# Altium PCB rf_main.PcbDoc (part 2 of 3)
Units mil, origin at the board's own origin, x right, y up, seen from the top; angles counter-clockwise.
Board outline 7331.84 x 2609.86 mil, 2 copper layers (Top Layer, Bottom Layer); 310 components, 184 nets, 868 pads, 739 vias.
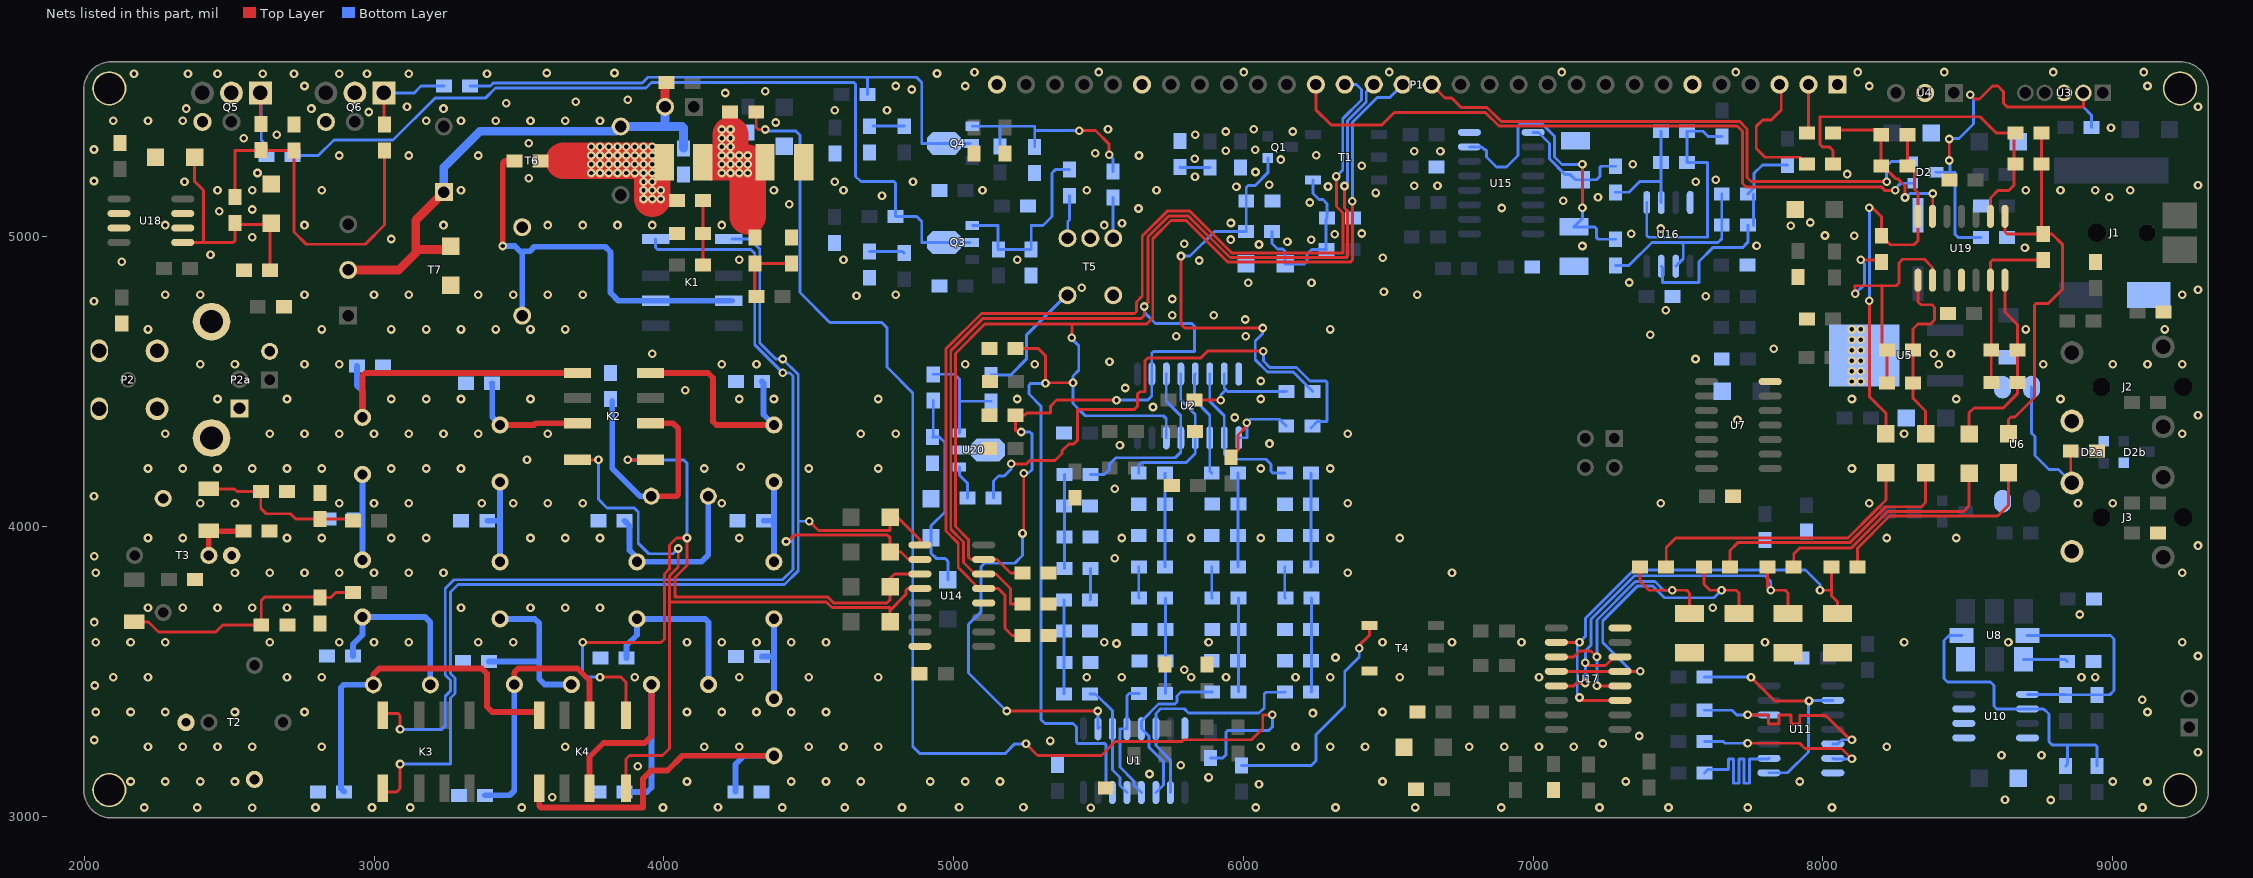
[diagram p2: the nets of this part, all layers, seen from the top]

## Via types
v1: diameter 30, hole 15, Top Layer to Bottom Layer, 739 vias

## Nets (pads, with @x,y where several pads share a name; then routed paths per layer and width w, separated by ;. In a path a pad name is that pad's centre, name@x,y a point inside that pad or via, vN(x,y) a via of type N, cw(c..) or ccw(c..) an arc to the next point about the centre after c; other vN are vias at no path point) (continued)
B3: C23.2 R3c.1 U2.7 | length 402.6
  Top Layer w10: R3c.1@5831.14,4435.78 5921.78,4435.78 v1(5922,4436)
  Bottom Layer w10: v1(5922,4436) 5922,4454 5940,4472 ; U2.7@5934,4526 5934,4478 5940,4472 ; C23.2@6149.14,4466.22 6054.22,4466.22 6054,4466 5946,4466 5940,4472
B4: C24.2 R3d.2 U2.9 | length 372.5
  Top Layer w10: R3d.2@5957.78,4238.86 5982,4263.08 5982,4316 6012,4346 v1(6012,4358)
  Bottom Layer w10: U2.9@5984,4306 6012,4306 v1(6012,4358) 6024,4370 6124.29,4370 C24.2@6148.07,4346.22
BAND0: C2a.1 C63.2 P1.16 U1.14 U2.14 U14.15 | length 6117.9
  Top Layer w10: C2a.1@5215.14,4613.78 5292.22,4613.78 5317,4589 v1(5317,4494) 5319,4496 v1(5412,4496) ; C63.2@5237.14,3839.78 5196.22,3839.78 5150,3886 U14.15@5104,3886 5060,3886 5052,3894 5052,3954 5006.22,3999.78 5006.22,4597.22 5107,4698 5408,4698 ; v1(5408,4651) 5408,4698 ; v1(6376,5122) 6376,4919 6369,4912 5946.75,4912 5802.75,5056 5750.37,5056 5687.27,4992.9 5687.27,4719.27 5666,4698 5408,4698
  Bottom Layer w10: v1(5317,4494) 5266,4494 5260,4488 5260,4457 5302,4415 5302,3333 5315,3320 5412,3320 5424,3308 5424,3254 5427,3251 5523,3251 5526,3248 5526,3104 U1.14@5548,3082 ; v1(5408,4651) 5408,4647.77 5432,4623.77 5432,4539 5412,4519 v1(5412,4496) 5412,4424.53 5454.31,4382.22 5723.78,4382.22 5734,4372 U2.14@5734,4306 ; v1(6376,5122) 6377,5123 6377,5395 6462,5480 6505,5480 P1.16@6550,5525
BAND1: C2b.1 C62.2 P1.17 U1.2 U2.2 U14.14 | length 6250.5
  Top Layer w10: v1(5183,3363) v1(5498,3363) ; v1(5234,4326) 5220,4326 5214.14,4331.86 C2b.1@5214.14,4383.78 5243.78,4383.78 5251.5,4391.5 5335,4391.5 5335,4416 5355,4436 v1(5562,4436) ; v1(5238,3976) 5242,3980 v1(5242,4184) ; C62.2@5249.14,3732 5196,3732 5196,3786 5146,3836 U14.14@5104,3836 5102,3834 5076,3834 5034,3876 5034,3946.63 4990.22,3990.41 4990.22,4606.59 5100.63,4717 5647,4717 5658,4728 v1(5658,4759) 5671.27,4772.27 5671.27,4999.53 5743.75,5072 5809.37,5072 5953.37,4928 6357,4928 6360,4931 6360,5088 6349,5099 v1(6349,5175)
  Bottom Layer w10: v1(5183,3363) 5052,3494 5052,3662.3 5094,3704.3 5094,3860 5107,3873 5211,3873 5238,3900 v1(5238,3976) ; v1(5234,4326) 5264,4326 5270,4320 5270,4195 5259,4184 v1(5242,4184) ; v1(5498,3363) U1.2@5498,3302 U1.2@5503,3307 ; v1(5562,4436) 5670,4436 5684,4450 U2.2@5684,4526 5684,4598 5690,4604 5832,4604 5832,4690 5822,4700 5697,4700 5658,4739 v1(5658,4759) ; v1(6349,5175) 6359,5185 6359,5400 6424,5465 6424,5499 P1.17@6450,5525
BAND2: C61.2 P1.18 U14.13 | length 3617.8
  Top Layer w10: C61.2@5249.14,3641.78 5231.37,3624 5202,3624 5178,3648 5178,3762 5154,3786 U14.13@5104,3786 5088,3786 5016,3858 5016,3942 4974,3984 4974,4014 4974.22,4014.22 4974.22,4613.22 5096,4735 5624,4735 5631,4742 5631,4775 5651,4795 5651,5001.88 5737.12,5088 5816,5088 5960,4944 6344,4944 6344,5081.37 6321,5104.37 v1(6321,5208)
  Bottom Layer w10: v1(6321,5208) 6343,5230 6343,5407 6408,5472 6408,5506.41 6407.5,5506.9 6407.5,5508 6390.5,5525 P1.18@6350,5525
EXT_M: K1.8 K3.8 R32.1 U14.2 | length 4093
  Top Layer w10: K3.8@3030.39,3359.8 3036.19,3354 3084,3354 3090,3348 v1(3090,3300) ; v1(4410,4530) v1@4414,4526 ; v1(4422,3948) 4428,3948 4450,3970 4772,3970 4781.14,3960.86 R32.1@4781.14,3911.78 4818.22,3911.78 4844,3886 U14.2@4884,3886
  Bottom Layer w10: v1(3090,3300) 3234,3300 3246,3312 3246,3414 3263.29,3431.29 3263.29,3470.08 3246,3487.37 3246,3786 3276,3816 4410,3816 4446,3852 4446,3950 ; K1.8@3972.02,4991.61 3972.02,4962.4 3978.42,4956 4300,4956 4314,4942 4314,4627.37 v1@4410.69,4530.69 ; v1(4410,4530) 4435.37,4530 4446,4519.37 4446,3950 ; v1(4422,3948) 4444,3948 4446,3950
EXT_P: K1.1 K3.1 R31.1 U14.1 | length 3981.4
  Top Layer w10: K3.1@3030.39,3084.2 3078.2,3084.2 3090,3096 v1(3090,3180) ; v1@4500,4020 v1(4502,4018) 4534,3986 4781.14,3986 R31.1@4781.14,4031.78 4806.22,4031.78 4884,3954 U14.1@4884,3936
  Bottom Layer w10: v1(3090,3180) 3264,3180 3264,3408 3279.29,3423.29 3279.29,3476.71 3264,3492 3264,3774 3290,3800 4416.63,3800 4464,3847.37 4464,4020 ; K1.1@4235.8,4991.61 4297.39,4991.61 4331,4958 4331,4633 4386,4578 v1(4410,4578) 4464,4524 4464,4020 ; v1(4502,4018) 4466,4018 4464,4020
GND: C1a.2 C1b.2 C2a.2 C2b.2 C2c.2 C2d.2 C7.2 C8.2 C9.1 C10.1 C15.2 C16.2 C17.1 C18.1 C25.2 C26.2 C27.2 C28.2 C28a.1 C29.2 C29a.1 C30.2 C31.2 C32.1 C33.2 C33a.1 C33b.2 C34.2 C35.1 C36.2 C40.2 C42.1 C45.2 C46.2 C47.1 C48.1 C49.2 C50.1 C51.1 C52.1 C53.2 C54.1 C55.1 C56.1 C57.2 C58.2 C59.1 C60.1 C61.1 C62.1 C63.1 C63a.2 C65.2 C66.1 C67.2 C68.2 C69.2 C72.1 C75.1 C76.2 C76a.2 C77.1 C79.1 C80.1 C82.1 C83.2 C84.2 C85.2 C86.2 C87.2 C88.1 C89.1 C90.2 C93.2 C94.2 C94a.2 C95.2 C96.2 C96a.2 C97.2 C98.1 C101.1 C102.1 C103.2 C104.1 C105.2 C106.1 C106a.2 C114.2 C115.2 C126.1 C127.1 C128.2 C129.1 D1.1 D2a.1 D2b.1 D4.1 DS1.1 J1.2 J2.S J3.S L1.1 L2.1 L3.1 L4.1 L9.1 L10.1 L11.1 L12.1 P1.1 P1.6 P1.25 P1.30 P2.2 P2a.2 pad.h1 pad.h2 pad.h3 pad.h4 Q5.2 Q6.2 R1a.1 R1c.1 R2b.2 R2d.2 R10.2 R11.1 R14.2 R37.2 R38.1 R50.1 R57.1 R58.1 R61.2 R62.2 R69.1 R74.2 R76.2 R77.1 R79.1 R83b.1 R101.1 T2.1 T2.5 T3.1 T3.5 T4.6 T5.2 T5.4 T7.5 U1.8 U2.8 U3.3 U4.2 U5.2 U6.2 U6.3 U7.7 U8.3 U10.4 U10.5 U10.6 U10.7 U11.7 U14.8 U14.12 U15.8 U16.4 U17.8 U18.2 U18.3 U18.6 U18.7 U19.11 U20.2
  other v1: 2580,3029 5473,3029 2207,3030 2390,3030 2798,3030 2993,3030 3125,3030 3510,3030 3997,3030 4409,3030 4624,3030 4822,3030 6043,3030 6318,3030 6593,3030 6890,3030 7229,3030 7467,3030 7741,3030 8031,3030 9103,3030 4187,3031 5019,3031 5241,3031 8786,3056 8628,3057 3615,3066 6054,3110 2160,3120 2280,3120 2400,3120 2520,3120 4080,3120 4440,3120 4560,3120 4680,3120 4920,3120 5040,3120 5160,3120 6480,3120 7320,3120 7920,3120 9000,3120 9120,3120 5880,3134 5676,3146 3910,3173 5784,3176 8616,3210 8754,3210 9294,3221 2220,3240 2340,3240 2460,3240 2580,3240 2820,3240 3660,3240 4140,3240 4260,3240 4500,3240 4620,3240 4740,3240 6060,3240 6180,3240 6300,3240 6420,3240 6780,3240 6900,3240 7020,3240 7140,3240 8220,3240 7240,3251 5334,3260 2035,3263 7366,3277 6240,3356 2040,3360 2160,3360 2280,3360 2520,3360 2760,3360 4080,3360 4200,3360 4320,3360 4440,3360 4560,3360 6480,3360 9120,3360 9102,3402 2036,3451 2100,3480 2220,3480 2700,3480 2820,3480 3900,3480 4260,3480 4500,3480 4740,3480 5460,3480 5580,3480 5820,3480 5940,3480 6180,3480 6300,3480 6540,3480 7020,3480 8892,3480 8940,3480 5796,3506 6318,3548 9294,3553 5562,3596 2040,3600 2160,3600 2280,3600 2640,3600 2880,3600 3000,3600 3120,3600 3360,3600 3480,3600 4080,3600 4200,3600 4320,3600 4440,3600 4560,3600 5520,3600 5880,3600 6480,3600 6720,3600 6960,3600 7800,3600 8280,3600 8640,3600 9240,3600 2035,3670 8886,3696 2220,3720 2340,3720 2460,3720 2580,3720 2700,3720 3300,3720 3540,3720 3660,3720 3780,3720 7620,3720 2040,3840 2520,3840 2640,3840 2760,3840 2880,3840 3000,3840 3120,3840 3240,3840 6360,3840 6720,3840 9240,3840 5556,3890 2035,3897 9294,3934 2220,3960 2340,3960 2700,3960 2820,3960 3060,3960 3180,3960 3540,3960 3660,3960 3780,3960 4260,3960 5580,3960 5820,3960 6060,3960 6300,3960 6540,3960 8220,3960 8460,3960 2400,4080 2520,4080 2880,4080 3000,4080 3120,4080 3372,4080 3480,4080 3600,4080 3720,4080 4200,4080 6360,4080 7440,4080 8160,4080 8880,4080 9000,4080 2034,4104 5556,4130 2220,4200 2340,4200 2460,4200 2580,4200 2700,4200 2820,4200 3060,4200 3180,4200 3300,4200 4140,4200 4500,4200 4740,4200 6060,4200 6300,4200 8100,4200 4266,4206 3528,4230 5574,4280 6090,4286 2280,4320 2640,4320 2760,4320 2880,4320 3000,4320 3120,4320 3240,4320 3360,4320 3600,4320 4680,4320 4800,4320 6360,4320 8280,4320 9240,4320 7705,4368 5970,4376 9294,4384 5688,4412 2460,4440 2700,4440 3060,4440 3180,4440 3300,4440 3540,4440 4260,4440 4380,4440 4740,4440 5220,4440 6060,4440 8100,4440 8460,4440 8820,4440 4074,4470 5592,4478 8100,4500 8130,4500 6060,4502 8100,4536 8130,4536 2400,4560 2520,4560 2760,4560 2880,4560 4200,4560 4320,4560 5040,4560 5280,4560 8400,4560 8760,4560 9000,4560 9120,4560 9240,4560 5538,4568 8100,4572 8130,4572 7560,4578 3960,4596 8382,4596 8442,4596 8100,4608 8130,4608 7830,4613 8100,4644 8130,4644 5768,4656 6008,4656 7404,4662 2220,4680 2820,4680 3060,4680 3180,4680 3300,4680 3420,4680 3540,4680 3660,4680 6300,4680 8100,4680 8130,4680 8700,4680 9180,4680 6007,4714 5755,4729 5898,4729 7458,4746 2034,4777 5755,4785 7596,4794 4665,4796 2280,4800 2400,4800 2760,4800 3000,4800 3120,4800 3360,4800 3480,4800 3600,4800 3720,4800 4800,4800 6600,4800 9240,4800 6485,4810 9294,4817 5442,4824 6017,4841 6235,4841 7332,4842 2130,4914 5848,4918 4260,4920 4620,4920 5220,4920 6481,4927 2436,4938 8697,4962 7170,4968 7771,4969 6054,4973 5796,4976 6152,4983 6234,4989 5956,4990 3060,4992 2580,4998 8108,5003 8007,5004 6315,5008 7338,5010 6409,5011 7440,5028 7889,5038 2280,5040 2760,5040 3240,5040 3600,5040 3720,5040 3840,5040 3960,5040 4200,5040 5520,5040 5581,5046 5957,5047 7956,5049 2466,5088 2580,5094 5638,5097 6892,5099 4433,5112 6229,5118 7104,5124 7224,5136 8988,5136 4753,5141 6457,5151 2460,5160 2580,5160 2820,5160 3300,5160 4380,5160 4620,5160 5100,5160 5460,5160 5700,5160 8700,5160 8820,5160 8940,5160 9060,5160 5976,5172 6292,5173 6590,5176 6670,5176 9294,5178 6089,5179 2346,5190 4590,5190 4860,5190 7561,5190 2034,5192 7630,5196 3534,5202 5833,5207 8084,5216 2598,5220 6042,5223 6408,5245 7344,5250 6129,5266 5832,5269 2880,5280 3120,5280 3360,5280 5640,5280 6252,5281 5489,5288 6590,5295 6680,5295 5939,5296 6041,5300 2034,5301 3534,5322 2550,5340 2664,5352 5834,5352 5939,5363 6170,5363 5533,5371 6036,5371 8994,5376 4386,5394 2100,5400 2220,5400 2340,5400 3180,5400 3300,5400 3420,5400 3540,5400 3660,5400 3780,5400 2982,5430 4590,5436 4770,5436 2352,5442 2784,5442 3240,5442 3114,5448 9294,5448 3456,5460 3696,5466 3876,5472 4212,5496 4350,5502 4856,5508 2760,5520 4800,5520 5040,5520 8160,5520 9120,5520 2172,5562 2358,5562 2460,5562 2616,5562 2724,5562 2880,5562 2976,5562 3120,5562 3390,5562 4943,5563 3596,5565 3830,5565 5072,5567 5501,5568 6001,5568 6503,5568 7099,5568 7699,5568 8120,5568 8419,5568 8795,5568 9107,5568
IN_I: P1.3 R84.1 | length 473.7
  Top Layer w10: P1.3@7850,5525 7856,5519 7856,5437.23 7820.77,5402 7791,5402 7770,5381 7770,5304 7800,5274 7921.08,5274 R84.1@7944.86,5250.22
IN_Q: P1.2 R85.1 | length 168.9
  Top Layer w10: R85.1@7944.86,5358.22 7950,5363.37 P1.2@7950,5525
INT_M: K2.8 K4.8 R34.1 U14.4 | length 2612.6
  Top Layer w10: K2.8@3702.02,4230.39 3702.41,4230 v1(3774.47,4230) ; K4.8@3869.61,3084.2 3869.61,3197.61 3882,3210 3996,3210 4020,3234 4020,3740 ; v1(4050,3924) 4050,3860 4020,3830 4020,3740 ; U14.4@4884,3786 4842,3786 4836,3780 4836,3766 4781.14,3711.14 R34.1@4781.14,3671.78 4781.14,3718.86 4780,3720 4580,3720 4560,3740 4020,3740
  Bottom Layer w10: v1(3774.47,4230) 3774.47,4093.8 3804.47,4063.8 3898.2,4063.8 3912,4050 3912,3942 3948,3906 4032,3906 v1(4050,3924)
INT_P: K2.1 K4.1 R33.1 U14.3 | length 2766.5
  Top Layer w10: v1(3720,3600) 3990,3600 4002,3612 4002,3836 4020,3854 4020,3936 4044,3960 v1(4080,3960) 4080,3865 4039,3824 4039,3756 4566.63,3756 4586.63,3736 4770,3736 4781.14,3747.14 R33.1@4781.14,3791.78 4781.14,3821.14 4796,3836 U14.3@4884,3836 ; v1(3780,3480) 3852,3480 3869.61,3462.39 K4.1@3869.61,3359.8 ; v1(3875.53,4230) 3953.59,4230 K2.1@3953.98,4230.39 ; K2.1@3965.4,4230 K2.1@3965.8,4230.39
  Bottom Layer w10: v1(3720,3600) 3720,3492 3732,3480 v1(3780,3480) ; v1(3875.53,4230) 4068,4230 4080,4218 v1(4080,3960)
JC_CLK1: R23.2 U11.5 U11.12 | length 822.3
  Top Layer w10: v1(7740,3350) 7812,3350 7812,3318 7848,3318 7848,3350 7890,3350 7890,3318 7920,3318 7920,3348 8010,3348 8094,3264 v1(8100,3264)
  Bottom Layer w10: R23.2@7590.86,3365.78 7686.22,3365.78 7702,3350 v1(7740,3350) U11.12@7814,3350 ; U11.5@8034,3250 8051.43,3250 8065.43,3264 v1(8100,3264)
JC_CLK2: R25.2 U11.6 | length 600.9
  Top Layer w10: v1(7740,3252) 7920,3252 7938,3234 8064,3234 v1(8100,3198)
  Bottom Layer w10: R25.2@7590.86,3257.78 7591.08,3258 7656,3258 7662,3252 v1(7740,3252) ; U11.6@8034,3200 8036,3198 v1(8100,3198)
JC_CLK3: R24.2 U11.9 | length 601
  Bottom Layer w10: R24.2@7590.86,3149.78 7603.08,3162 7674,3162 7674,3198 7692,3198 7692,3114 7710,3114 7710,3198 7728,3198 7728,3114 7746,3114 7746,3198 7812,3198 U11.9@7814,3200
JC_CLK4: R22.2 U11.2 U11.8 | length 820.7
  Top Layer w10: v1(7752,3480) 7834,3398 v1(7952,3398)
  Bottom Layer w10: R22.2@7590.86,3479.78 7591.08,3480 v1(7752,3480) ; U11.8@7814,3150 7878,3150 7950,3222 7950,3396 v1(7952,3398) 7954,3400 U11.2@8034,3400
LO_SCL: R17.1 R20.1 U8.8 U10.2 | length 1064.7
  Bottom Layer w10: U8.8@8479.8,3624 U8.8@8477.83,3624 8436,3624 8418.22,3606.22 8418.22,3475 8430.22,3463 8578,3463 8590,3451 8590,3380 8599.39,3370.61 U10.2@8706.17,3370.61 8761.76,3370.61 8780,3352.36 8780,3257.39 8791.39,3246 8844,3246 ; R20.1@8837.78,3173.14 8844,3179.37 8844,3246 ; R17.1@8945.78,3173.14 8945.78,3240.22 8940,3246 8844,3246
LO_SDA: R16.1 R21.1 U8.7 U10.1 | length 787.8
  Bottom Layer w10: U8.7@8704.2,3624 U8.7@8706.17,3624 8992,3624 9004.09,3611.91 9004.09,3433.43 8989.8,3419.14 R16.1@8945.78,3419.14 R21.1@8837.78,3419.14 8836.31,3420.61 U10.1@8706.17,3420.61
NetC1_1: C1.1 C81.1 | length 4303.3
  Top Layer w10: C81.1@4319.14,5429.78 4319.14,5376.86 4326,5370 v1(4350,5370) ; v1(5250,3250) 5290,3210 5510,3210 5558,3258 5787.23,3258 5793.23,3264 6028,3264 6067,3303 6067,3350 v1(6100,3350)
  Bottom Layer w10: v1(4350,5370) 4356,5364 4456,5364 4470,5350 4470,4807 4573,4704 4752,4704 4770,4686 4770,4550 4859,4461 4859,3241 4884,3216 5177,3216 5211,3250 v1(5250,3250) ; C1.1@5886.22,3200.86 5928.86,3200.86 5940,3212 5940,3290 5945.78,3295.78 6087.78,3295.78 6100,3308 v1(6100,3350)
NetC2_1: C2.1 T4.4 | length 807.5
  Top Layer w10: v1(6400,3580) 6400,3590 6435.83,3625.83 T4.4@6435.83,3658.74
  Bottom Layer w10: C2.1@5993.78,3175.14 6234.14,3175.14 6250,3191 6250,3280 6350,3380 6350,3500 6400,3550 v1(6400,3580)
NetC3_1: C3.1 C7.1 C11.1 L1.2 | length 324
  Bottom Layer w10: C3.1@5380.92,3422.63 C7.1@5380.92,3638.63 C11.1@5380.92,3746.63
NetC3_2: C3.2 U1.3 U1.13 | length 404.9
  Bottom Layer w10: C3.2@5470.92,3422.63 5471.56,3422 5490,3422 5549,3363 5549,3303 U1.3@5548,3302 5548,3160 5574,3134 5574,3106 U1.13@5598,3082
NetC4_1: C4.1 C8.1 C12.1 L2.2 | length 324
  Bottom Layer w10: C4.1@5982.63,3429.08 C8.1@5982.63,3645.08 C12.1@5982.63,3753.08
NetC4_2: C4.2 U1.5 U1.11 | length 587.1
  Bottom Layer w10: U1.11@5698,3082 5724,3108 5724,3188 5675,3237 5675,3275 U1.5@5648,3302 5648,3328 5707,3387 5764.03,3387 5770.78,3393.74 5770.78,3414.78 5785.08,3429.08 C4.2@5892.63,3429.08
NetC5_1: C5.1 C9.2 C13.1 L3.2 | length 325.5
  Bottom Layer w10: C5.1@6233.14,3428.22 6234.63,3429.71 C13.1@6234.63,3753.08
NetC5_2: C5.2 U1.6 U1.10 | length 809.7
  Bottom Layer w10: U1.10@5748,3082 5748,3194 5698,3244 U1.6@5698,3302 5698,3355 5714,3371 5796,3371 5811,3356 6054,3356 6072,3374 6072,3422 6078,3428 6142.92,3428 C5.2@6143.14,3428.22
NetC6_1: C6.1 C10.2 C14.1 L4.2 | length 330
  Bottom Layer w10: C6.1@5730.63,3423.08 C14.1@5730.63,3753.08
NetC6_2: C6.2 U1.4 U1.12 | length 434.2
  Bottom Layer w10: C6.2@5640.63,3423.08 5605.08,3423.08 5598,3416 U1.4@5598,3302 5574,3302 5574,3170 5622,3122 5622,3108 U1.12@5648,3082
NetC11_2: C11.2 L5.1 | length 109.2
  Bottom Layer w10: C11.2@5470.92,3746.63 5472.63,3748.35 L5.1@5472.63,3855.08
NetC12_2: C12.2 L6.1 | length 108.3
  Bottom Layer w10: L6.1@5890.92,3860.63 5890.92,3754.79 C12.2@5892.63,3753.08
NetC13_2: C13.2 L7.1 | length 108.3
  Bottom Layer w10: L7.1@6142.92,3860.63 6142.92,3754.79 C13.2@6144.63,3753.08
NetC14_2: C14.2 L8.1 | length 107.3
  Bottom Layer w10: L8.1@5639.14,3859.78 5639.14,3754.57 C14.2@5640.63,3753.08
NetC15_1: C15.1 C19.2 L5.2 L9.2 | length 324
  Bottom Layer w10: L5.2@5382.63,3855.08 L9.2@5382.63,3963.08 C19.2@5382.63,4179.08
NetC16_1: C16.1 C20.2 L6.2 L10.2 | length 324
  Bottom Layer w10: L6.2@5980.92,3860.63 L10.2@5980.92,3968.63 C20.2@5980.92,4184.63
NetC17_2: C17.2 C21.2 L7.2 L11.2 | length 324
  Bottom Layer w10: L7.2@6232.92,3860.63 L11.2@6232.92,3968.63 C17.2@6232.92,4076.63 C21.2@6232.92,4184.63
NetC18_2: C18.2 C22.2 L8.2 L12.2 | length 324.9
  Bottom Layer w10: C22.2@5728.92,4184.63 C18.2@5728.92,4076.63 L12.2@5728.92,3968.63 5728.92,3860 L8.2@5729.14,3859.78
NetC19_1: C19.1 U2.3 U2.13 | length 645.1
  Bottom Layer w10: C19.1@5472.63,4179.08 5521.08,4179.08 5538,4196 5538,4215 5560,4237 5765,4237 5784,4256 U2.13@5784,4306 5784,4382 5734,4432 U2.3@5734,4526
NetC20_1: C20.1 U2.5 U2.11 | length 366.6
  Bottom Layer w10: U2.5@5834,4526 5832,4524 5832,4436 5884,4384 U2.11@5884,4306 5884,4191.56 C20.1@5890.92,4184.63
NetC21_1: C21.1 U2.6 U2.10 | length 546.8
  Bottom Layer w10: U2.6@5884,4526 5884,4432 5934,4382 U2.10@5934,4306 5934,4250 5952,4232 6078,4232 6096,4214 6096,4190 6101.37,4184.63 C21.1@6142.92,4184.63
NetC22_1: C22.1 U2.4 U2.12 | length 533.2
  Bottom Layer w10: C22.1@5638.92,4184.63 5638.92,4211.08 5648.84,4221 5803,4221 5834,4252 U2.12@5834,4306 5834,4386 5784,4436 U2.4@5784,4526
NetC23_1: C23.1 Q1.1 R36.2 R37.1 | length 1444.8
  Top Layer w10: v1(5785,4933) 5785,4698 5798,4685 v1(6067,4685)
  Bottom Layer w10: v1(5785,4933) 5816,4933 5901,5018 6009.79,5018 6009.86,5017.93 R37.1@6009.86,5122.78 6009.86,5169.86 6016,5176 6040,5176 6084.34,5220.34 Q1.1@6084.34,5271.39 ; v1(6067,4685) 6067,4666 6041,4640 6041,4575 6083,4533 6172.37,4533 C23.1@6239.14,4466.22
NetC24_1: C24.1 C113.2 | length 1823.4
  Top Layer w10: v1(5199,4216) 5251,4216 5263,4228 5350,4228 5374,4252 5374,4261 5398,4285 5415,4285 5427,4297 5427,4401 5429,4403 5623,4403 5634,4414 5634,4456 5643,4465 5660,4465 5660,4571 5671,4582 5854,4582 5877,4605 v1(6069,4605)
  Bottom Layer w10: C113.2@5137.86,4098.78 5137.86,4156.86 5155,4174 5175,4174 5199,4198 v1(5199,4216) ; v1(6069,4605) 6069,4571 6091,4549 6183,4549 6229.78,4502.22 6284.78,4502.22 6289,4498 6289,4362 6254.92,4362 C24.1@6233.14,4340.22
NetC33a_2: C33a.2 J3.R U6.4 | length 516.3
  Top Layer w10: J3.R@8855.14,4154.21 C33a.2@8855.14,4259.78 ; C33a.2@8856.86,4260.22 C33a.2@8859.24,4257.83
  Bottom Layer w10: U6.4@8720,4480.85 8720,4322 8732,4310 8732,4245 8780,4197 8812.35,4197 J3.R@8859.24,4150.11
NetC35_2: C35.2 U8.1 | length 154.1
  Bottom Layer w10: U8.1@8692,3541.32 8836.04,3541.32 C35.2@8843.14,3534.22
NetC45_1: C45.1 K2.5 L13.1 | length 1063.4
  Top Layer w20: L13.1@2960.36,4376.43 2960.36,4520.36 2970,4530 3689.81,4530 K2.5@3690.2,4529.61
  Bottom Layer w20: C45.1@2940.86,4553.78 2940.86,4487.14 2960.36,4467.64 L13.1@2960.36,4376.43
NetC46_1: C46.1 K2.7 L14.1 | length 412.5
  Top Layer w20: L14.1@3435.04,4350.39 3552.39,4350.39 3558,4356 K2.7@3689.83,4356
  Bottom Layer w20: C46.1@3407.14,4494.22 3408,4493.37 3408,4377.43 L14.1@3435.04,4350.39
NetC47_2: C47.2 K2.2 L15.1 | length 822.7
  Top Layer w20: L15.1@3956.69,4104.33 4044.33,4104.33 4050,4110 4050,4338 4031.62,4356.38 K2.2@3965.8,4356.38
  Bottom Layer w20: C47.2@3822,4432.92 3822,4200 3917.67,4104.33 L15.1@3956.69,4104.33
NetC48_2: C48.2 K2.4 L16.1 | length 742.6
  Top Layer w20: K2.4@3965.8,4529.61 4152.39,4529.61 4170,4512 4170,4362 4181.61,4350.39 L16.1@4379.92,4350.39
  Bottom Layer w20: C48.2@4338.86,4499.78 4344,4494.63 4344,4386.31 L16.1@4379.92,4350.39
NetC49_1: C49.1 L13.2 L17.1 | length 322.5
  Bottom Layer w20: C49.1@2933.14,4026.22 2960.14,4026.22 C49.1@2960.36,4026 ; L17.1@2960.36,3884.43 C49.1@2960.36,4026 ; L13.2@2960.36,4179.57 C49.1@2960.36,4026
NetC50_2: C50.2 L14.2 L18.1 | length 319.9
  Bottom Layer w20: C50.2@3390.86,4019.78 3434.82,4019.78 3435.04,4020 ; L18.1@3435.04,3877.95 3435.04,4020 ; L14.2@3435.04,4153.54 3435.04,4020
NetC51_2: C51.2 L15.2 L19.1 | length 618.1
  Bottom Layer w20: C51.2@3864.86,4019.78 3882,4002.63 3882,3918 3907.48,3892.52 L19.1@3907.48,3877.95 4129.95,3877.95 4153.54,3901.54 L15.2@4153.54,4104.33
NetC52_2: C52.2 L16.2 L20.1 | length 310.7
  Bottom Layer w20: C52.2@4344.86,4019.78 4379.7,4019.78 4379.92,4020 ; L20.1@4379.92,3877.95 4379.92,4020 ; L16.2@4379.92,4153.54 4379.92,4020
NetC53_1: C53.1 L17.2 L21.1 | length 606.6
  Bottom Layer w20: C53.1@2927.14,3552.22 2927.14,3593.14 2960.36,3626.36 L17.2@2960.36,3687.57 3176.43,3687.57 3194.43,3669.57 L21.1@3194.43,3453.64
NetC54_2: C54.2 L18.2 L22.1 | length 625.5
  Bottom Layer w20: C54.2@3396.86,3533.78 3569.78,3533.78 3570,3534 ; L18.2@3435.04,3681.1 3554.9,3681.1 3570,3666 3570,3534 ; L22.1@3681.1,3454.72 3589.28,3454.72 3570,3474 3570,3534
NetC55_2: C55.2 L19.2 L23.1 | length 617.1
  Bottom Layer w20: C55.2@3870.86,3545.78 3870.86,3588.86 3907.48,3625.48 L19.2@3907.48,3681.1 4142.9,3681.1 4154.43,3669.57 L23.1@4154.43,3454.72
NetC56_2: C56.2 L20.2 L24.1 | length 316.7
  Bottom Layer w20: C56.2@4338.86,3551.78 4379.7,3551.78 4379.92,3552 ; L24.1@4379.92,3405.51 4379.92,3552 ; L20.2@4379.92,3681.1 4379.92,3552
NetC57_1: C57.1 K4.4 L21.2 | length 1226.2
  Top Layer w20: L21.2@2997.57,3453.64 2997.57,3489.57 3018,3510 3372,3510 3390,3492 3390,3378 3408.2,3359.8 K4.4@3570.39,3359.8
  Bottom Layer w20: C57.1@2897.14,3084.22 2886,3095.37 2886,3444 2895.64,3453.64 L21.2@2997.57,3453.64
NetC58_1: C58.1 K4.2 L22.2 | length 906.6
  Top Layer w20: L22.2@3484.25,3454.72 3484.25,3496.25 3498,3510 3702,3510 3743.62,3468.38 K4.2@3743.62,3359.8
  Bottom Layer w20: C58.1@3383.14,3072.22 3468.22,3072.22 3484.25,3088.25 L22.2@3484.25,3454.72
NetC59_2: C59.2 K4.7 L23.2 | length 996.7
  Top Layer w20: K4.7@3743.62,3084.2 K4.7@3743.62,3096.02 3743.62,3204.62 3792,3253 3934,3253 3957.57,3276.57 L23.2@3957.57,3454.72
  Bottom Layer w20: C59.2@3864.86,3083.78 3941.78,3083.78 3957.57,3099.57 L23.2@3957.57,3454.72
NetC60_2: C60.2 K4.5 L24.2 | length 1232.4
  Top Layer w20: K4.5@3570.39,3084.2 3570.39,3035.61 3576,3030 3928,3030 3928,3129 3957,3158 4013,3158 4063.66,3208.66 L24.2@4379.92,3208.66
  Bottom Layer w20: C60.2@4247.14,3084.22 4247.14,3179.14 4276.66,3208.66 L24.2@4379.92,3208.66
NetC65_1: C65.1 C76a.1 R35.2 R36.1 T1.4 | length 588.6
  Bottom Layer w10: R36.1@6099.14,5017.22 6099.14,4976.86 6118,4958 6136,4958 6144.14,4949.86 C76a.1@6144.14,4906.22 6211.22,4906.22 6220,4915 6220,4940 6236.22,4956.22 R35.2@6287.14,4956.22 6285,4958.37 6285,5059.92 C65.1@6288.86,5063.78 6288,5064.63 6288,5115 6275,5128 6261,5128 6239.83,5149.17 T1.4@6239.83,5195.26
NetC66_2: C66.2 R39.1 | length 105
  Bottom Layer w10: C66.2@5780.78,5240.14 5782.07,5238.86 R39.1@5885.22,5238.86
NetC68_1: C68.1 R43.1 U15.9 | length 419.5
  Bottom Layer w10: U15.9@7000,5360 7018,5360 7056,5322 7056,5269 7111,5214 7128.27,5214 C68.1@7145.88,5196.39 7218.39,5196.39 7230,5208 7230,5238 7235.14,5243.14 R43.1@7283.78,5243.14
NetC69_1: C69.1 R44.1 U15.7 | length 1060.4
  Top Layer w10: v1(7170,5100) v1(7170,5250)
  Bottom Layer w10: U15.7@6780,5310 6822.23,5310 6831.23,5301 6835,5301 6839,5297 6839,5275 6874,5240 6908,5240 6948,5280 6948,5382 6954,5388 7032.53,5388 7074,5346.53 7074,5275 7100,5249 7169,5249 v1(7170,5250) ; v1(7170,5100) 7170,5063.48 C69.1@7140.12,5033.61 7212.39,5033.61 7218,5028 7218,4998 7224.86,4991.14 R44.1@7283.78,4991.14
NetC70_1: C70.1 R43.2 R45.1 U16.2 | length 418.6
  Bottom Layer w10: R43.2@7283.78,5153.14 7331.14,5153.14 7368,5190 7440.86,5190 ; C70.1@7440.86,5363.78 R45.1@7440.86,5255.78 7440.86,5190 ; U16.2@7442,5118 7440.86,5119.14 7440.86,5190
NetC70_2: C70.2 R45.2 R46.1 U16.1 | length 892.2
  Bottom Layer w10: U16.1@7392,5118 7392,5004 7398,4998 7602,4998 7602,5256 ; 7601.78,5255.78 R45.2@7530.86,5255.78 C70.2@7530.86,5363.78 7586.22,5363.78 7604.14,5345.86 R46.1@7652.22,5345.86
NetC74_1: C74.1 R44.2 R48.1 U16.6 | length 655.2
  Bottom Layer w10: R44.2@7283.78,4901.14 7331.14,4901.14 7410,4980 7512,4980 ; U16.6@7492,4898 7518,4924 7518,4974 7512,4980 ; R48.1@7650.86,5147.78 C74.1@7650.86,5039.78 7650.86,4992.86 7638,4980 7512,4980
NetC74_2: C74.2 R47.1 R48.2 U16.7 | length 826.1
  Bottom Layer w10: U16.7@7442,4898 7446,4894 7446,4842 7572,4842 7572,4914 7620,4962 7722,4962 7740.86,4980.86 C74.2@7740.86,5039.78 ; R48.2@7740.86,5147.78 7762,5168.92 7762,5218.77 7791.09,5247.86 R47.1@7877.22,5247.86 ; C74.2@7760.86,5038.78 R48.2@7760.86,5146.78
NetC78_1: C78.1 D3.2 RFC2.1 | length 430.9
  Top Layer w125: 3654,5261.78 3948.22,5261.78 v1(3960,5250) v1(3960,5220) v1(3960,5190) v1(3960,5160) v1(3960,5130)
  other v1: 3930,5130 3990,5130 3930,5160 3990,5160 3930,5190 3750,5220 3780,5220 3810,5220 3840,5220 3870,5220 3900,5220 3930,5220 3750,5250 3780,5250 3810,5250 3840,5250 3870,5250 3900,5250 3930,5250 3750,5280 3780,5280 3810,5280 3840,5280 3870,5280 3900,5280 3930,5280 3960,5280 3750,5310 3780,5310 3810,5310 3840,5310 3870,5310 3900,5310 3930,5310 3960,5310
NetC78_2: C78.2 K1.3 K1.6 T7.4 | length 1520.2
  Top Layer w20: v1(3444,4968) 3444,5253 3452.78,5261.78 C78.2@3485.14,5261.78
  Bottom Layer w20: v1(3444,4968) 3486,4968 3504,4950 ; T7.4@3511.28,4727.73 3511.28,4942.72 3504,4950 ; K1.3@4235.8,4779.01 3960.2,4779.01 3842.99,4779.01 3815.78,4806.22 3815.78,4947.22 3798,4965 3553.16,4965 3538.16,4950 3504,4950
NetC79_2: C79.2 R54.2 RFC2.2 | length 222
  Top Layer w10: R54.2@4134.86,4902.22 C79.2@4134.86,5010.22 RFC2.2@4134.86,5124.22
NetC80_2: C80.2 R53.1 RFC3.2 | length 241.4
  Top Layer w10: R53.1@4319.14,4793.78 4314.22,4798.7 RFC3.2@4314.22,4907.14 C80.2@4440.22,4907.14
NetC81_2: C81.2 D3.1 D4.2 RFC3.1 | length 402.7
  Top Layer w125: D3.1@4164,5256 v1@4289.07,5256 ; v1@4230,5259.46 v1@4230,5352 ; 4290,5070 v1@4290,5255.07
  other v1: 4200,5220 4230,5220 4260,5220 4290,5220 4200,5250 4230,5250 4260,5250 4290,5250 4200,5280 4230,5280 4260,5280 4290,5280 4200,5310 4230,5310 4200,5340 4230,5340 4200,5370 4230,5370
NetC82_2: C82.2 D5.2 R58.2 RFC10.2 | length 584.5
  Top Layer w10: D5.2@2429.77,4129.46 2518.54,4129.46 2527.44,4120.56 C82.2@2609.29,4120.56 2609.29,4062.71 2628,4044 2712,4044 2730.86,4025.14 R58.2@2814.22,4025.14 2921.78,4025.14 RFC10.2@2927.14,4019.78 RFC10.2@2921.59,4014.23
NetC83_1: C83.1 D6.2 R62.1 RFC11.2 | length 884.7
  Top Layer w10: D6.2@2172.23,3670.54 2221.46,3670.54 2256,3636 2454,3636 2478.22,3660.22 C83.1@2610.86,3660.22 2610.86,3744.86 2622,3756 2814,3756 2814.22,3755.78 R62.1@2822,3755.78 ; R62.1@2814.22,3755.14 2850.87,3755.14 2868.5,3772.78 RFC11.2@2928.14,3772.78
NetC84_1: C84.1 R63.2 U17.3 U17.10 | length 1639.6
  Top Layer w10: U17.10@7080,3600 v1(7160,3600) ; v1(7160,3410) 7170,3400 U17.3@7300,3400 ; v1(7990,3780) 8029.14,3780 ; R63.2@8029.14,3859.78 8029.14,3780 ; C84.1@8049.88,3699.61 8049.88,3740.12 8029.14,3760.86 8029.14,3780
  Bottom Layer w10: v1(7160,3410) 7152,3418 7152,3592 v1(7160,3600) 7180,3620 7180,3682.63 7347.37,3850 7940,3850 7990,3800 v1(7990,3780)
NetC85_1: C85.1 R64.2 U17.6 U17.13 | length 1408.2
  Top Layer w10: U17.13@7080,3450 7140,3450 7150,3460 v1(7180,3460) ; v1(7180,3530) 7190,3520 7250,3520 7280,3550 U17.6@7300,3550 ; R64.2@7809.14,3859.78 7809.14,3790.86 v1(7820,3780) 7870,3780 7879.88,3770.12 C85.1@7879.88,3699.61
  Bottom Layer w10: v1(7180,3460) v1(7180,3530) 7180,3570 7200,3590 7200,3680 7350,3830 7800,3830 7820,3810 v1(7820,3780)
NetC86_1: C86.1 R65.2 U17.4 U17.11 | length 1098.3
  Top Layer w10: U17.11@7080,3550 7140,3550 7160,3570 7200,3570 v1(7220,3550) ; v1(7220,3450) U17.4@7300,3450 ; R65.2@7369.14,3859.78 7369.14,3810.86 7400,3780 v1(7480,3780) 7530,3780 7539.88,3770.12 C86.1@7539.88,3699.61
  Bottom Layer w10: v1(7220,3450) v1(7220,3550) 7220,3677.37 7352.63,3810 7420,3810 7450,3780 v1(7480,3780)
NetC87_1: C87.1 R66.2 U17.5 U17.12 | length 1275.8
  Top Layer w10: U17.12@7080,3500 U17.5@7300,3500 v1(7370,3500) ; R66.2@7589.14,3859.78 7589.14,3800.86 7610,3780 v1(7650,3780) 7700,3780 7709.88,3770.12 C87.1@7709.88,3699.61
  Bottom Layer w10: v1@7360,3500 7340,3500 7240,3600 7240,3674.75 7359.25,3794 7413.37,3794 7453.37,3754 7624,3754 v1(7650,3780)
NetC91_1: C91.1 Q3.1 R73.1 R74.1 | length 668.8
  Bottom Layer w10: Q3.1@5064.93,5039.06 5154,5039.06 5153.78,5038.83 5153.78,4955.14 5154.86,4956.22 R74.1@5267.78,4956.22 ; R74.1@5268,4957.08 5268,5038.83 ; 5268,5039.06 5268,5038.83 ; C91.1@5399.78,5231.14 5351.14,5231.14 5340,5220 5340,5070 5308.83,5038.83 5268,5038.83
NetC91_2: C91.2 T5.1 | length 139.5
  Bottom Layer w10: T5.1@5393.26,5004.36 5394,5005.1 5394,5052 5399.78,5057.78 C91.2@5399.78,5141.14
NetC92_1: C92.1 Q4.1 R75.2 R76.1 | length 732.8
  Top Layer w10: v1(5434,5366) 5490,5366 5537,5319 v1(5537,5283)
  Bottom Layer w10: Q4.1@5064.93,5381.06 5160,5381.06 ; R75.2@5159.78,5309.14 5159.78,5380.83 5160,5381.06 ; R76.1@5280.22,5310.86 5280.22,5366 ; v1(5434,5366) 5280.22,5366 ; v1(5537,5283) 5549.78,5270.22 C92.1@5549.78,5225.14 ; 5160,5381.06 5280,5381.06 5280.22,5380.83 5280.22,5366
NetC92_2: C92.2 T5.3 | length 131.2
  Bottom Layer w10: C92.2@5549.78,5135.14 5550.74,5134.18 T5.3@5550.74,5004.36
NetC94_1: C94.1 R78.1 | length 122.5
  Bottom Layer w10: C94.1@4709.78,4949.14 4823.78,4949.14 R78.1@4829.78,4943.14
NetC95_1: C95.1 R80.1 | length 108
  Bottom Layer w10: C95.1@4722,5382 R80.1@4830,5382
NetC96_1: C96.1 C96a.1 R83b.2 RFC7.1 U18.1 | length 830.6
  Top Layer w10: U18.1@2340,4980 2514,4980 2519.78,4985.78 RFC7.1@2519.78,5046.86 2524.7,5041.93 2640.86,5041.93 R83b.2@2640.86,4884.22 ; C96.1@2381.14,5273.78 2381.14,5190.86 2412,5160 2412,4980
NetC99_1: C99.1 Q5.1 R81.2 | length 332
  Top Layer w10: Q5.1@2608,5496.06 2608,5391.49 R81.2@2609.78,5389.71
  Bottom Layer w10: Q5.1@2608,5496.06 2610.86,5493.21 2610.86,5333.14 2628.86,5315.14 C99.1@2628.86,5279.78
NetC99_2: C99.2 Q3.2 RFC5.1 | length 2966.9
  Bottom Layer w10: C99.2@2718.86,5279.78 2807.78,5279.78 2862,5334 3066,5334 3210,5478 3384,5478 3419,5513 3939,5513 3958,5532 4656,5532 4662,5526 4662,5208 4680,5190 4794,5190 4799.14,5184.86 RFC5.1@4799.14,5070.22 4871.78,5070.22 4890,5052 4890,4980 Q3.2@4966.5,4980 Q3.2@5057.06,4980
NetC100_1: C100.1 Q6.1 R82.1 | length 326.5
  Top Layer w10: Q6.1@3034,5496.06 3034,5389.37 R82.1@3036.22,5387.14
  Bottom Layer w10: Q6.1@3034,5496.06 3138.7,5496.06 3162.41,5519.78 C100.1@3240.86,5519.78
NetC100_2: C100.2 Q4.2 RFC6.1 | length 2016
  Bottom Layer w10: C100.2@3330.86,5519.78 3401.78,5519.78 3413,5531 3926,5531 3945,5550 4692,5550 4872,5550 4890,5532 4890,5322 Q4.2@4966.5,5322 Q4.2@5057.06,5322 ; RFC6.1@4703.14,5490.22 4703.14,5550
NetC101_2: C101.2 R81.1 R82.2 RFC7.2 | length 1259.5
  Top Layer w10: RFC7.2@2519.78,5136.86 2519.78,5296.7 2520.22,5297.14 C101.2@2724.22,5297.14 2724.22,5015.78 2766,4974 2970,4974 3036.22,5040.22 R82.2@3036.22,5297.14
NetC106_2: C106.2 C106a.1 R83a.1 RFC8.2 T6.1 T6.4 T7.2 | length 1835.8
  Top Layer w30: T7.2@2910.88,4885.21 3085.21,4885.21 3144,4944 3144,4968 ; T6.1@3240.88,5153.73 3144,5056.85 3144,4968 ; C106a.1@3264.22,4967.14 3253.08,4956 3156,4956 3144,4968 ; RFC8.2@4004,5448 4004,5527.37 R83a.1@4008.86,5532.22
  Bottom Layer w30: T6.1@3240.88,5153.73 3240.88,5238.88 3366,5364 3835.01,5364 T6.4@3851.12,5380.11 4002.11,5380.11 ; RFC8.2@4004,5448 4004,5382 4002.11,5380.11 ; C106.2@4068.22,5304.86 4068.22,5375.78 4063.89,5380.11 4002.11,5380.11
NetC107_1: C107.1 R84.2 R86.1 U19.2 | length 1238.2
  Top Layer w10: R84.2@8034.86,5250.22 8034.86,5297.14 8022,5310 7998,5310 7990,5318 7990,5414 8542,5414 8597.78,5358.22 R86.1@8658.86,5358.22 ; U19.2@8578,5070 8578,5134 8604,5160 8641.71,5160 8658.86,5177.14 R86.1@8658.86,5358.22 ; R86.1@8664.86,5358.22 R86.1@8658.86,5358.22
NetC107_2: C107.2 C109.1 R86.2 R88.1 U19.1 | length 1384.5
  Top Layer w10: U19.1@8628,5070 8628,5016 8634.86,5009.14 R88.1@8760.22,5009.14 ; C109.1@8640.22,4320.14 8640.22,4369.5 8648.95,4378.22 8663.22,4378.22 8730,4445 8730,4764 8736,4770 8778,4770 8826,4818 8826,4974 8790.86,5009.14 R88.1@8760.22,5009.14 ; R86.2@8754.86,5358.22 C107.2@8754.86,5250.22 8754.86,5014.51 R88.1@8760.22,5009.14
NetC107a_1: C107a.1 C110.1 R90.2 U19.14 | length 676.8
  Top Layer w10: C110.1@8504.22,4319.14 8504.22,4392.22 8521,4409 8622,4409 8670.86,4457.86 R90.2@8670.86,4608.22 8670.86,4697.14 8628,4740 U19.14@8628,4850
NetC107a_2: C107a.2 R88.2 R90.1 U19.13 | length 601.7
  Top Layer w10: C107a.2@8581.14,4496.78 8580.86,4497.07 R90.1@8580.86,4608.22 8580.86,4847.14 U19.13@8578,4850 8578,4912 8585.14,4919.14 R88.2@8760.22,4919.14
NetC108_1: C108.1 C112.1 R87.1 R89.1 U19.7 | length 1455.9
  Top Layer w10: v1(8160,4779) 8160,4448 8217.22,4390.78 C112.1@8217.22,4320.14 ; v1(8160,5100) 8171,5100 8202.22,5068.78 R89.1@8202.22,5003.14 8233.37,4972 8314,4972 8328,4986 U19.7@8328,5070 8328,5152 8316,5164 8316,5224.92 8291.14,5249.78 R87.1@8291.14,5357.78
  Bottom Layer w10: v1(8160,4779) v1(8160,5100)
NetC108_2: C108.2 R85.2 R87.2 U19.6 | length 619.2
  Top Layer w10: R85.2@8034.86,5358.22 8044.63,5368 8200.7,5368 C108.2@8200.7,5250.22 ; C108.2@8201.14,5243.78 8207.22,5243.78 8251,5200 8258,5200 8283,5175 v1(8283,5135) ; U19.6@8378,5070 8379,5071 v1(8379,5149)
  Bottom Layer w10: v1(8283,5135) 8287,5135 8301,5149 v1(8379,5149)
NetC108a_1: C108a.1 C111.1 R91.2 U19.8 | length 650.2
  Top Layer w10: U19.8@8328,4850 8328,4775 8338,4765 8376,4765 8385,4756 8385,4712 8372,4699 8328,4699 8310.86,4681.86 R91.2@8310.86,4608.22 8310.86,4442.14 8354.22,4398.78 C111.1@8354.22,4320.14
NetC108a_2: C108a.2 R89.2 R91.1 U19.9 | length 973.4
  Top Layer w10: v1(8111,4803) 8111,4830.69 8252.69,4830.69 8262,4840 8262,4909 8275,4922 8350,4922 8378,4894 U19.9@8378,4850 ; v1(8130,4920) 8195.37,4920 R89.2@8202.22,4913.14 ; R91.1@8203.86,4610.22 8203.86,4831 ; R91.1@8220.86,4608.22 8220.86,4496.07 C108a.2@8221.14,4495.78
  Bottom Layer w10: v1(8111,4803) 8144,4836 8144,4906 v1(8130,4920)
NetC109_2: C109.2 R63.1 | length 759.7
  Top Layer w10: R63.1@8119.14,3859.78 8119.14,3925.14 8230,4036 8603,4036 8640.22,4073.22 C109.2@8640.22,4185.14
NetC110_2: C110.2 R64.1 | length 832.2
  Top Layer w10: R64.1@7899.14,3859.78 7899.14,3905.14 7920,3926 8097.37,3926 8223.37,4052 8485,4052 8504.22,4071.22 C110.2@8504.22,4184.14
NetC111_2: C111.2 R66.1 | length 903.7
  Top Layer w10: R66.1@7679.14,3859.78 7679.14,3917.14 7706,3944 8092.75,3944 8216.75,4068 8340,4068 8354.22,4082.22 C111.2@8354.22,4185.14
NetC112_2: C112.2 R65.1 | length 987.4
  Top Layer w10: R65.1@7459.14,3859.78 7459.14,3927.14 7492,3960 8086,3960 8175.37,4049.37 8175.49,4049.37 8217.22,4091.11 C112.2@8217.22,4185.14
NetC113_1: C113.1 U20.1 | length 117.7
  Bottom Layer w10: U20.1@5020.07,4204.94 5020.07,4176.93 5047.86,4149.14 C113.1@5047.86,4098.78
NetC114_1: C114.1 C115.1 R102.2 RFC12.2 | length 713.1
  Bottom Layer w10: RFC12.2@4929.78,4435.14 4929.78,4310.14 C114.1@4927.78,4308.14 4951.86,4308.14 4970,4290 4970,4050 4922.22,4002.22 C115.1@4922.22,3960.86 4922.22,3907.78 4940,3890 4970,3890 4980.22,3879.78 R102.2@4980.22,3815.86
NetC116_1: C116.1 T5.6 | length 452.5
  Bottom Layer w10: C116.1@5128.78,4522.14 5196.14,4522.14 5251,4577 5251,4660 5388.57,4797.57 T5.6@5393.26,4797.57 T5.6@5393.26,4772.26
NetC116_2: C116.2 RFC12.1 U20.3 | length 391.5
  Bottom Layer w10: RFC12.1@4929.78,4525.14 5002.86,4525.14 5020.07,4507.93 5020.07,4431 ; U20.3@5020.07,4323.06 5020.07,4431 ; C116.2@5128.78,4432.14 5021.21,4432.14 5020.07,4431
NetD2_1: D2.1 P1.19 | length 2417.2
  Top Layer w10: P1.19@6250,5525 6250,5438 6302,5386 6478,5386 6521,5429 6835,5429 6882,5382 7704,5382 7722,5364 7722,5184 7734,5172 8201.23,5172 8213.23,5160 v1(8250,5160)
  Bottom Layer w10: v1(8250,5160) 8250,5166 8268.39,5184.39 D2.1@8310.34,5184.39
NetD2_2: D2.2 P1.15 | length 1957.9
  Top Layer w10: P1.15@6650,5525 6696,5479 6719,5479 6752,5446 6840.63,5446 6888.63,5398 7712,5398 7738,5372 7738,5204 7752,5190 v1(8220,5190)
  Bottom Layer w10: v1(8220,5190) 8220,5244 8235.39,5259.39 D2.2@8310.34,5259.39
NetD2_3: D2.3 R9.1 R10.1 U3.2 | length 1336.7
  Top Layer w10: v1(8436,5263) v1(8436,5337) ; v1(8508,5490) 8523,5475 8540.23,5475 8585.23,5520 8604,5520 8622.5,5501.5 8622.5,5461.5 8636,5448 8898,5448 ; 8898.93,5448.93 U3.2@8898.93,5485.63
  Bottom Layer w10: D2.3@8390.34,5222.39 8438,5222.39 ; v1(8436,5263) 8438,5261 8438,5222.39 ; v1(8436,5337) 8438,5339 8470,5339 8520,5389 8520,5478 v1(8508,5490) ; R10.1@8544.86,4997.78 8466.22,4997.78 8456.39,5007.61 8456.39,5222.39 8438,5222.39 ; U3.2@8898.93,5496.06 8898.93,5447.07 8927.14,5418.86 R9.1@8927.14,5376.22
NetD5_1: D5.1 R57.2 T3.4 | length 203.6
  Top Layer w20: T3.4@2430,3900 2430,3984.24 2430.46,3983.78 R57.2@2549.14,3983.78